# Altium PCB PCB1.PcbDoc (part 1 of 2)
Units mil, origin at the board's own origin, x right, y up, seen from the top; angles counter-clockwise.
Board outline 5190.03 x 3710.02 mil, 4 copper layers (Top Layer, nixie tubes, GND, Bottom Layer), stack 23.756 mil thick; 74 components, 90 nets, 262 pads, 53 vias.
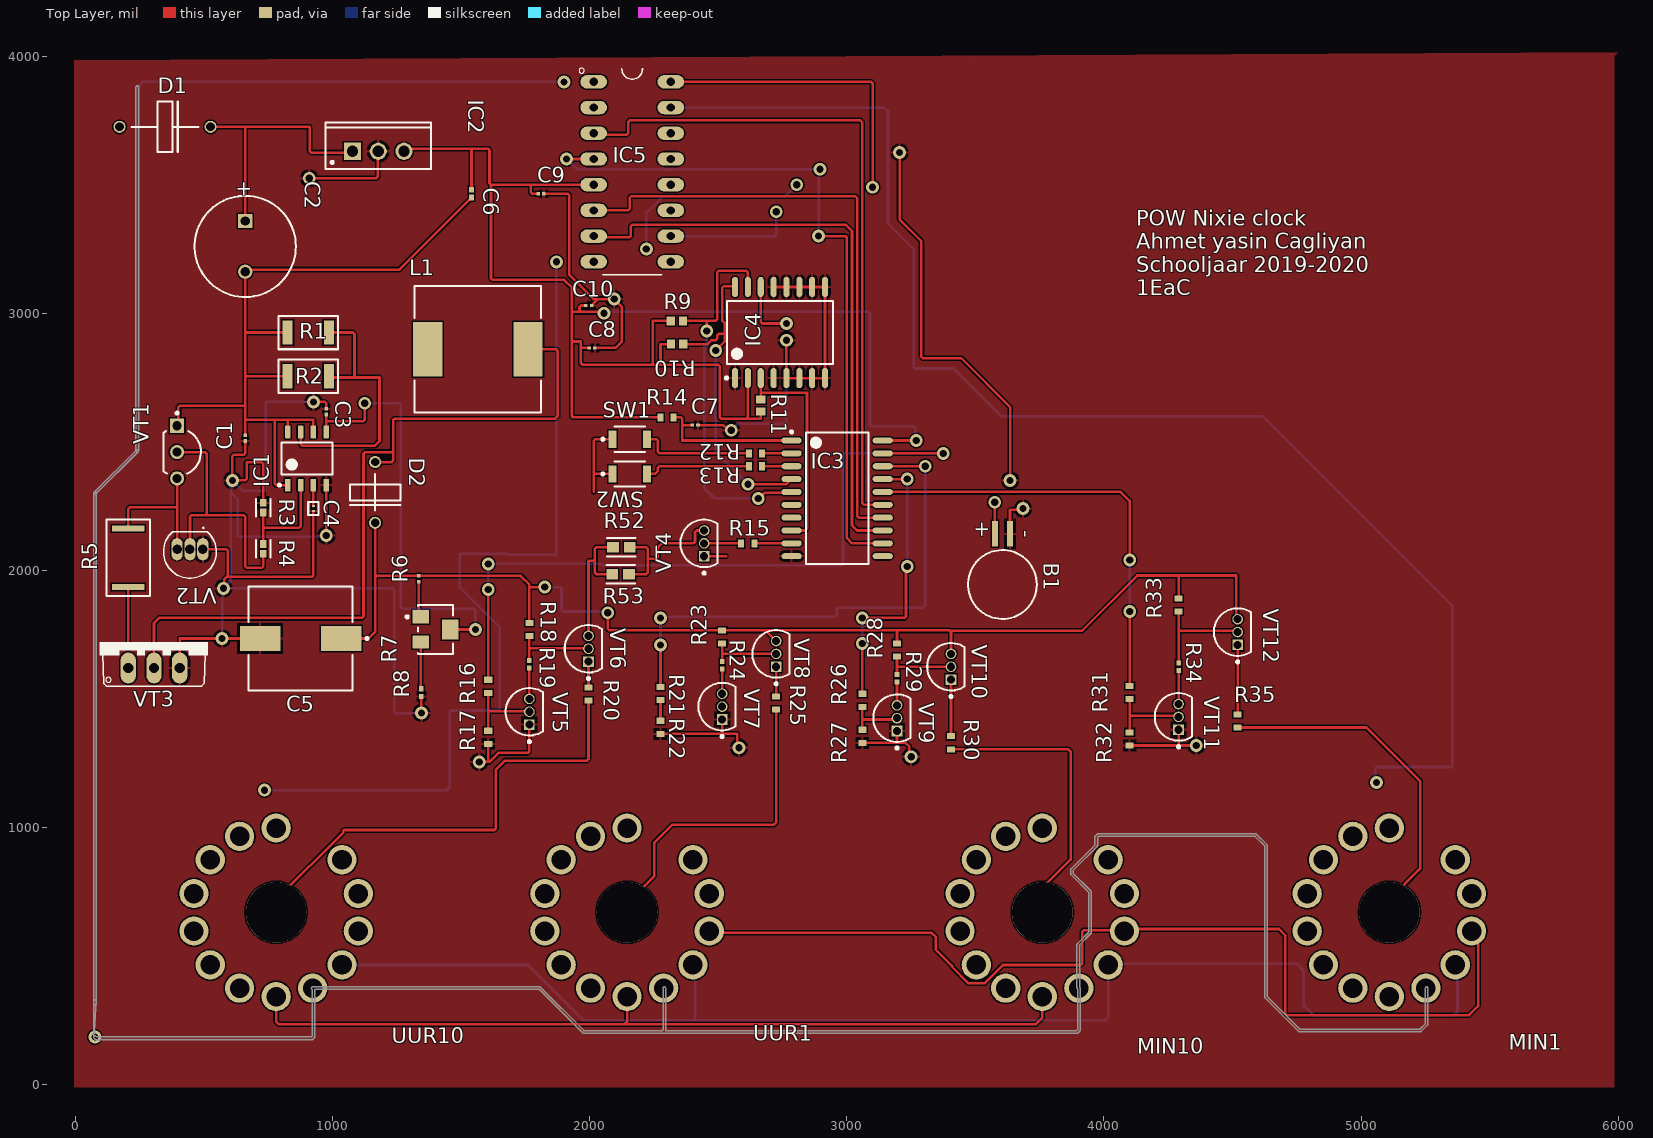
[diagram p0: Top Layer view]
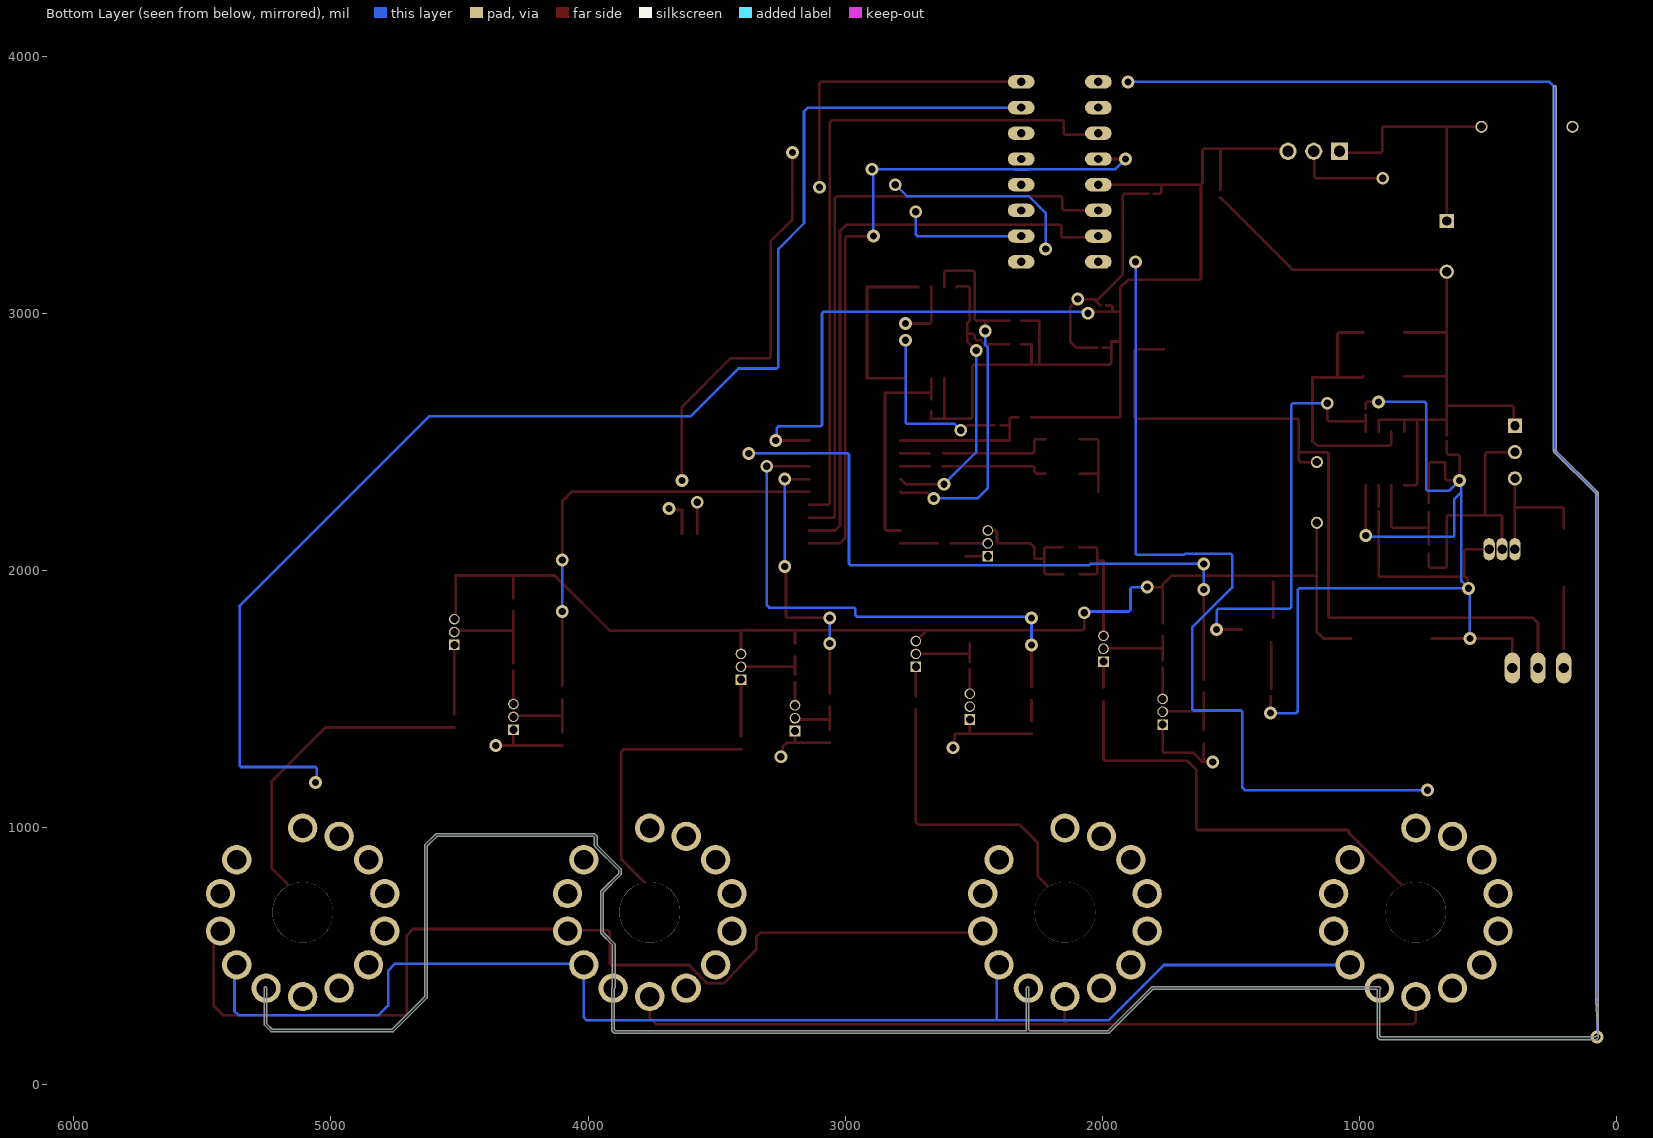
[diagram p1: Bottom Layer view, seen from below]
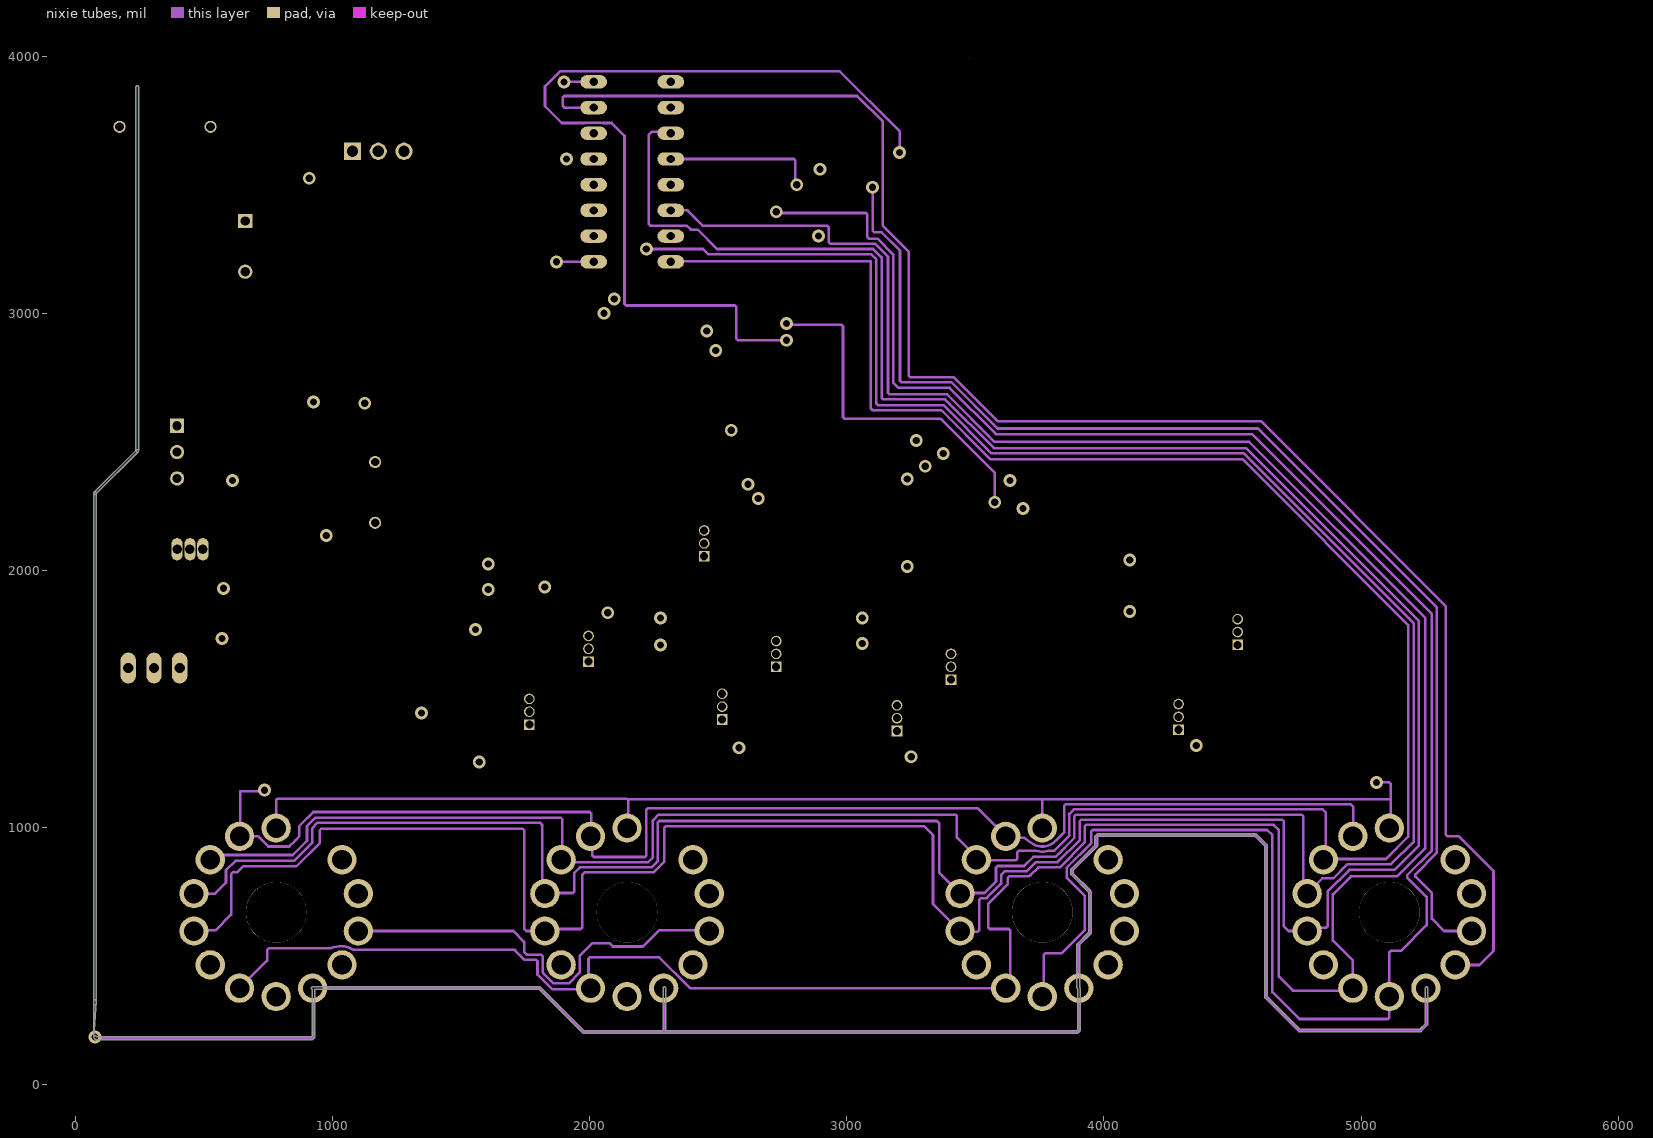
[diagram p2: nixie tubes]

## Layer stack, top to bottom
Top Solder: solder mask 0.4, Solder Resist, Dk 3.5
Top Layer: signal copper 1.4
Dielectric 2: prepreg 2.8, PP-006, Dk 4.1
nixie tubes: signal copper 1.378
Dielectric 1: dielectric 12.6, FR-4, Dk 4.8
GND: signal copper 1.378
Dielectric 3: prepreg 2.8, PP-006, Dk 4.1
Bottom Layer: signal copper 1.4
Bottom Solder: solder mask 0.4, Solder Resist, Dk 3.5

## Board outline
71.47,181.44 cw(c75,185) 69.98,185 cw(c75,185) 78.55,188.55 82.08,185.02 917.92,185.02 919.98,187.08 919.98,369.77 918.58,371.18 918.6,371.16 cw(c922.13,374.72) 922.13,379.74 1805.28,379.74 cw(c1805.28,374.72) 1808.84,378.25 1808.82,378.27 1977.08,210.02 2282.06,210.02 2284.99,212.94 2284.99,374.72 cw(c2290,374.72) 2295.01,374.72 2295.01,210.86 cw(c2290,210.86) 2294.94,210.02 3894.19,210.02 3897.11,212.94 3897.11,372.65 3896.45,373.3 3896.47,373.29 cw(c3900,376.85) 3894.98,376.85 3894.98,545 cw(c3900,545) 3896.47,548.56 3896.45,548.55 3939.98,592.08 3939.98,747.92 3871.45,816.45 3871.47,816.44 cw(c3875,820) 3869.98,820 3869.98,835 cw(c3875,835) 3871.47,838.56 3871.45,838.55 3964.98,932.08 3964.98,964.14 cw(c3970,964.14) 3966.47,967.71 3966.45,967.69 3972.31,973.55 3972.29,973.53 cw(c3975.86,970) 3975.86,975.02 4590,975.02 cw(c4590,970) 4593.56,973.53 4593.55,973.55 4633.55,933.55 4633.53,933.56 cw(c4630,930) 4635.02,930 4635.02,342.08 4762.08,215.02 5227.92,215.02 5249.98,237.08 5249.98,374.72 cw(c5255,374.72) 5260.02,374.72 5260.02,235 cw(c5255,235) 5258.53,231.44 5258.55,231.45 5233.55,206.45 5233.56,206.47 cw(c5230,210) 5230,204.98 4760,204.98 cw(c4760,210) 4756.44,206.47 4756.45,206.45 4626.45,336.45 4626.47,336.44 cw(c4630,340) 4624.98,340 4624.98,927.92 4587.92,964.98 3977.94,964.98 3975.02,962.06 3975.02,930 cw(c3970,930) 3973.53,926.44 3973.55,926.45 3880.02,832.92 3880.02,822.08 3948.55,753.55 3948.53,753.56 cw(c3945,750) 3950.02,750 3950.02,590 cw(c3945,590) 3948.53,586.44 3948.55,586.45 3905.02,542.92 3905.02,378.93 3905.67,378.27 3905.66,378.29 cw(c3902.13,374.72) 3907.14,374.72 3907.14,210.86 cw(c3902.13,210.86) 3905.66,207.29 3905.67,207.31 3899.81,201.45 3899.83,201.47 cw(c3896.27,205) 3896.27,199.98 1975,199.98 cw(c1975,205) 1971.44,201.47 1971.45,201.45 1803.2,369.71 930.02,369.71 930.02,185 cw(c925,185) 928.53,181.44 928.55,181.45 923.55,176.45 923.56,176.47 cw(c920,180) 920,174.98 80,174.98 cw(c80,180) 76.44,176.47 76.45,176.45 71.45,181.45 69.98,185 69.98,325 cw(c75,325) 80.01,325.18 80.02,2297.92 80.02,2300 ccw(c75,2300) 71.47,2303.56 ccw(c75,2300) 69.98,2300 ccw(c75,2300) 78.55,2296.45 243.55,2461.45 243.53,2461.44 cw(c240,2465) 234.98,2465 234.98,3880 cw(c240,3880) 236.47,3883.56 cw(c240,3880) 245.02,3880 245.02,2465 ccw(c240,2465) 236.45,2468.55 71.45,2303.55 69.98,2300 69.98,315 ccw(c75,315) 69.98,314.82 ccw(c75,315) 80.01,315 80.01,325.18 cw(c75,325) 80.02,325
cut-out: 3475,3990

## Design rules (kind name [scope] priority, off if disabled: settings)
Clearance [OnLayer('Top Layer')] p1: gap=5 ignorepadtopadclearanceinfootprint=TRUE except(0: Arc-Hole Track-Hole SMDPad-Hole THPad-Hole Via-Hole Fill-Hole Poly-Hole Region-Hole Text-Hole; 10: Arc-Via Track-Via SMDPad-Via THPad-Via Via-Via)
HoleSize [All] p1: absolutevalues=TRUE maxlimit=300 minlimit=1 maxpercent=80.000 minpercent=20.000
MinimumSolderMaskSliver [All] p1: minsoldermaskwidth=0
PlaneConnect [InNet('GND') And OnLayer('GND')] p1: pad.planeconnectstyle=Relief pad.reliefexpansion=20 pad.reliefentries=4 pad.reliefconductorwidth=10 pad.reliefairgap=10 via.planeconnectstyle=Direct via.reliefexpansion=20 via.reliefentries=4 via.reliefconductorwidth=10 via.reliefairgap=10
PolygonConnect [All] p1: connectstyle=Relief reliefconductorwidth=10 reliefentries=4 polygonreliefangle="90 Angle" airgapwidth=10
RoutingVias [All] p1: holewidth=28 width=50 viastyle="Through Hole" minholewidth=28 minwidth=50 maxholewidth=28 maxwidth=50
SilkToSilkClearance [All] p1: silktosilkclearance=5
SilkToSolderMaskClearance [IsPad] p1: minsilkscreentomaskgap=0 clearancetoexposedcopper=TRUE
SolderMaskExpansion [All] p1: expansion=4 istentingtop=FALSE
Width [All] p1: maxlimit=10 minlimit=10 preferedwidth=10
25 further rules are at their usual default settings.

## Classes and differential pairs
component class PowerSupply: C1 C2 C3 C4 C5 C6 D1 D2 IC1 IC2 L1 R1 R2 R3 R4 R5 R6 R7 R8 VT1 VT2 VT3
component class Clock: B1 BATTERY C7 C8 C9 C10 IC3 IC4 IC5 MIN1 MIN10 R9 R10 R11 R12 R13 R14 R15 R16 R17 R18 R19 R20 R21 R22 R23 R24 R25 R26 R27 R28 R29 R30 R31 R32 R33 R34 R35 R52 R53 SW1 SW2 UUR1 UUR10 VT4 VT5 VT6 VT7 VT8 VT9 VT10 VT11 VT12

## Components (designator, comment, footprint, x,y, rotation, side; value= is the part's Value field where it differs from the comment)
B1 "3V Battery" PNSC-ML-621S-DN_V 3605,1945 r90 top (schematic designator B?)
C1 "0.1µF" CAPC0603X33X15LL03T05 660,2513.98 r270 top
C2 "470µF*25V" CAPPR60-500-1250X1000X1350 660,3260 r270 top
C3 "0.1µF" CAPC0603X33X15LL03T05 975,2617.05 r90 top
C4 "470pF" 470µF 925,2240 r270 top
C5 "10µF*400V" NIC-ULT2G100MNL1GS-2_V 875,1735 r270 top
C6 "100µFx16V" CAPC1005X55X30LL05T10 1540,3465 r270 top
C7 "0.1µF" CAPC0603X33X15LL03T05 2410,2565 r0 top
C8 "0.1µF" CAPC0603X33X15LL03T05 2008.98,2865 r0 top
C9 "0.1µF" CAPC0603X33X15LL03T05 1810,3465 r0 top
C10 "0.1µF" CAPC0603X33X15LL03T05 1996.02,3030 r0 top
D1 "SB260" sb260 170.67,3725 r0 top
D2 "BYV26C" BYV26C-TAP 1165,2421.22 r270 top
IC1 "MC34063" D0008A_L 900,2435 r90 top
IC2 "L7805" TO220 1177.2,3630 r0 top
IC3 "ATTINY" 20S_L 2962.17,2280 r0 top
IC4 "DS3231" W16#H2_L 2740,2925 r90 top
IC5 "SN74141N" *DIP762W46P254L2134H508Q16 2165,3550 r0 top
L1 "220µH" WE-PD-XXL 1565,2860 r0 top
MIN1 "Nixie_tube" *ZM1020_ZM1020(Primary) 5110,670 r180 top
MIN10 "Nixie_tube" *ZM1020_ZM1020(Primary) 3760,670 r180 top
R1 "0.33Ohm" 033Ohm 905,2925 r0 top
R2 "0.33Ohm" 033Ohm 905,2755 r0 top
R3 "390Ohm" FP-CRGCQ0402-IPC_A 730,2243.75 r270 top
R4 "390Ohm" FP-CRGCQ0402-IPC_A 730,2083.75 r270 top
R5 "20Ohm" 20Ohm 205,2163.35 r270 top
R6 "560KOhm" RESC0201(0603)_L 1335,1966.81 r90 top
R7 "5KOhm" BOUR-3214W_V 1400,1770 r0 top
R8 "3K3Ohm" RESC1005X40X25LL05T10 1345,1524.76 r90 top
R9 "5K1Ohm" RESC1608X55X30LL20T20 2338.62,2970 r180 top
R10 "5K1Ohm" RESC1608X55X30LL20T20 2340,2880 r180 top
R11 "5K1Ohm" RESC1608X55X30LL20T20 2665,2641.38 r270 top
R12 "1KOhm" RESC1608X55X25LL10T15 2644.41,2455 r180 top
R13 "1KOhm" RESC1608X55X25LL10T15 2645,2405 r180 top
R14 "1KOhm" RESC1608X55X25LL10T15 2300.59,2595 r180 top
R15 "10KOhm" RESC1608X55X25LL10T15 2614.41,2105 r180 top
R16 "10KOhm" RESC1608X55X25LL10T15 1605,1548.82 r90 top
R17 "10KOhm" RESC1608X55X25LL10T15 1605,1350.59 r90 top
R18 "10KOhm" RESC1608X55X25LL10T15 1765,1769.41 r90 top
R19 "1M" RESC1005X40X25LL05T10 1765,1635.24 r90 top
R20 "10KOhm" RESC1608X55X25LL10T15 1995,1519.41 r90 top
R21 "10KOhm" RESC1608X55X25LL10T15 2275,1520.59 r90 top
R22 "10KOhm" RESC1608X55X25LL10T15 2275,1389.41 r90 top
R23 "10KOhm" RESC1608X55X25LL10T15 2515,1740.59 r90 top
R24 "1M" RESC1005X40X25LL05T10 2515,1630.24 r90 top
R25 "10KOhm" RESC1608X55X25LL10T15 2725,1484.41 r90 top
R26 "10KOhm" RESC1608X55X25LL10T15 3060,1494.41 r90 top
R27 "10KOhm" RESC1608X55X25LL10T15 3060,1354.41 r90 top
R28 "10KOhm" RESC1608X55X25LL10T15 3195,1690.59 r90 top
R29 "1M" RESC1005X40X25LL05T10 3195,1580.24 r90 top
R30 "10KOhm" RESC1608X55X25LL10T15 3405,1329.41 r90 top
R31 "10KOhm" RESC1608X55X25LL10T15 4100,1525 r90 top
R32 "10KOhm" RESC1608X55X25LL10T15 4100,1344.41 r90 top
R33 "10KOhm" RESC1608X55X25LL10T15 4290,1865.59 r90 top
R34 "1M" RESC1005X40X25LL05T10 4290,1625 r90 top
R35 "10KOhm" RESC1608X55X25LL10T15 4520,1414.41 r90 top
R52 "220KOhm" FP-CRGCQ0603-IPC_A 2122.56,2090 r0 top
R53 "220KOhm" FP-CRGCQ0603-IPC_A 2120,1985 r0 top
SW1 "B3U-1000P" OMRON-B3U-1000_V 2155,2510 r0 top
SW2 "B3U-1000P" OMRON-B3U-1000_V 2155,2375 r0 top
UUR1 "Nixie_tube" *ZM1020_ZM1020(Primary) 2145,670 r180 top
UUR10 "Nixie_tube" *ZM1020_ZM1020(Primary) 780,670 r180 top
VT1 "BC546" ONSC-TO-92-3-29-11_AM_BL 395,2460 r270 top
VT2 "BC556" *TO92127P520H534-3 445,2060 r180 top
VT3 "IRF740" *TO220BV_IRF740(Primary) 305,1720 r0 top
VT4 "MPSA42" ONSC-TO-92-3-29-11 2445,2105 r90 top
VT5 "MPSA42" ONSC-TO-92-3-29-11 1765,1450 r90 top
VT6 "MPSA92" ONSC-TO-92-3-29-11 1995,1695 r90 top
VT7 "MPSA42" ONSC-TO-92-3-29-11 2515,1470 r90 top
VT8 "MPSA92" ONSC-TO-92-3-29-11 2725,1675 r90 top
VT9 "MPSA42" ONSC-TO-92-3-29-11 3195,1425 r90 top
VT10 "MPSA92" ONSC-TO-92-3-29-11 3405,1625 r90 top
VT11 "MPSA42" ONSC-TO-92-3-29-11 4290,1430 r90 top
VT12 "MPSA92" ONSC-TO-92-3-29-11 4520,1760 r90 top

## Footprints (in the part's own frame and the unit in brackets; to place one, negate y for a bottom-side part, rotate by r counter-clockwise, add the part's x,y. Pads: shape width x height; smd on the part's side, far side on the other; paste and mask are expansions set on the pad)
20Ohm [mm]
  rect 0.6x3.2 smd: 1(0,0) 2(5.8,0)
  silkscreen extent -0.89,-2.16 6.7,2.16
20S_L [mm] "SOIC, 20-Leads, Body 12.8x7.5mm, Pitch 1.27mm, IPC High Density"
  oval 2x0.6 smd: 1(-4.5,5.715) 2(-4.5,4.445) 3(-4.5,3.175) 4(-4.5,1.905) 5(-4.5,0.635) 6(-4.5,-0.635) 7(-4.5,-1.905) 8(-4.5,-3.175) 9(-4.5,-4.445) 10(-4.5,-5.715) 11(4.5,-5.715) 12(4.5,-4.445) 13(4.5,-3.175) 14(4.5,-1.905) 15(4.5,-0.635) 16(4.5,0.635) 17(4.5,1.905) 18(4.5,3.175) 19(4.5,4.445) 20(4.5,5.715)
  silkscreen extent -4.62,-6.5 3.1,6.69, body extent -3.8,-6.5 3.8,6.5, height 2.65
033Ohm [mm]
  rect 1x2.4 smd: 1(-2.032,0) 2(2.032,0)
  silkscreen extent -2.92,-1.65 2.92,1.65
470µF [mm]
  rect 0.2x0.3 smd: 1(-0.25,0) 2(0.25,0)
  silkscreen extent -0.64,-0.51 0.64,0.51
*DIP762W46P254L2134H508Q16 [mil]
  oval 104x52 hole 32: 1(-150,350) 2(-150,250) 3(-150,150) 4(-150,50) 6(-150,-150) 7(-150,-250) 8(-150,-350) 9(150,-350) 10(150,-250) 11(150,-150) 13(150,50) 14(150,150) 15(150,250) 16(150,350) GND(150,-50) VCC(-150,-50)
  silkscreen extent -207,-400 115,404
*TO220BV_IRF740(Primary) [mil]
  oval 60x120 hole 40: D(0,-100) G(-100,-100) S(100,-100)
  silkscreen extent -210,-170 210,0
*TO92127P520H534-3 [mm]
  oval 1.125x2.2 hole 0.94: 1(-1.27,-0.56)
  oval 1.1x2.2 hole 0.94: 2(0,-0.56) 3(1.27,-0.56)
  silkscreen extent -2.61,-2.71 2.61,2.3
*ZM1020_ZM1020(Primary) [mm]
  round 6 hole 6 unplated: None(0,0)
  round 2.895 hole 1.93: P1(0,-8.325) P2(3.61,-7.5) P3(6.51,-5.19) P4(8.12,-1.85) P5(8.12,1.85) P6(6.51,5.19) P7(3.61,7.5) P8(0,8.325) P9(-3.61,7.5) P10(-6.51,5.19) P11(-8.12,1.85) P12(-8.12,-1.85) P13(-6.51,-5.19)
BOUR-3214W_V [mm] "SMD, 3-Leads, Body 3.5x4.8mm, Pitch 1.25mm"
  rect 1.6x1.3 smd paste+0: 1(-1.45,1.25) 3(-1.45,-1.25)
  rect 1.6x2 smd paste+0: 2(1.45,0)
  silkscreen extent -2.92,-2.4 1.75,2.4, body extent -1.98,-2.41 1.98,2.41, height 5.28
BYV26C-TAP [mm]
  round 1.2 hole 0.82: A(0,0) K(6,0)
  silkscreen extent 1.2,-2.5 4.8,2.5
CAPC0603X33X15LL03T05 [mm] "Chip Capacitor, 2-Leads, Body 0.60x0.30mm, IPC High Density"
  rect 0.36x0.32 smd: 1(-0.28,0) 2(0.28,0)
  body extent -0.32,-0.17 0.32,0.17, height 0.33
CAPC1005X55X30LL05T10 [mm] "Chip Capacitor, 2-Leads, Body 1.00x0.50mm, IPC High Density"
  rect 0.56x0.52 smd: 1(-0.38,0) 2(0.38,0)
  body extent -0.53,-0.28 0.53,0.28, height 0.55
CAPPR60-500-1250X1000X1350 [mm] "THD, 2-Leads, Dia 10mm, Body Length 13.5mm"
  rect 1.4x1.4 hole 0.9: 1(-2.5,0)
  round 1.4 hole 0.9: 2(2.5,0)
  silkscreen extent -5,-5 5,5, body extent -5,-5 5,5, height 13.5
D0008A_L [mm] "SOIC, 8-Leads, Body 5x4mm, Pitch 1.27mm, IPC High Density"
  rrect18% 1.25x0.55 smd: 1(-2.625,1.905) 2(-2.625,0.635) 3(-2.625,-0.635) 4(-2.625,-1.905) 5(2.625,-1.905) 6(2.625,-0.635) 7(2.625,0.635) 8(2.625,1.905)
  silkscreen extent -2.75,-2.5 1.6,2.85, body extent -3,-2.45 3,2.45, height 1.63
FP-CRGCQ0402-IPC_A [mil]
  rect 29.91x26.48 smd paste+0 mask+0: 1(-18.75,0) 2(18.75,0)
  silkscreen extent -34,-29 34,29, body extent -42,-21 42,21, height 10
FP-CRGCQ0603-IPC_A [mil]
  rect 45.6x39.85 smd paste+0 mask+0: 1(-32.56,0) 2(32.56,0)
  silkscreen extent -55,-36 55,36, body extent -75,-40 75,40, height 10
NIC-ULT2G100MNL1GS-2_V [mm] "SMD, 2-Leads, Body 10.3x10.3mm, Height 14.5mm"
  rect 2.5x4 smd: 1(0,4) 2(0,-4)
  silkscreen extent -5.15,-5.15 5.15,6.68, body extent -5.15,-5.65 5.15,5.66, height 14.5
OMRON-B3U-1000_V [mm] "SMD, 2-Leads, Body 3x2.5mm"
  rect 0.8x1.7 smd: 1(-1.7,0) 2(1.7,0)
  silkscreen extent -2.77,-1.25 1.5,1.25, body extent -1.5,-1.25 1.5,1.25, height 1.75
ONSC-TO-92-3-29-11 [mm] "TO, 3-Leads, Body Dia 4.7mm, Pitch 1.27mm"
  rect 1.05x1.05 hole 0.8: 1(-1.27,0)
  round 1.05 hole 0.8: 2(0,0) 3(1.27,0)
  silkscreen extent -3.07,-1.34 2.35,2.35, body extent -2.35,-1.33 2.36,2.36, height 7.87
ONSC-TO-92-3-29-11_AM_BL [mm] "TO, 3-Leads, Body Dia 4.7mm, Pitch 2.6mm"
  rect 1.4x1.4 hole 0.9: 1(-2.6,0)
  round 1.4 hole 0.9: 2(0,0) 3(2.6,0)
  silkscreen extent -3.97,-1.34 2.13,2.35, body extent -2.84,-1.34 2.84,2.35, height 5.33
PNSC-ML-621S-DN_V [mm] "Battery, Lihium, Diameter 6.8mm"
  rect 2.5x0.6 smd: 1(5,0.75) 2(5,-0.75)
  silkscreen extent -3.4,-3.4 3.4,3.4, body extent -3.4,-3.4 6,3.4, height 2.55
RESC0201(0603)_L [mm] "Chip Resistor, Body 0.6x0.3mm, IPC High Density"
  rect 0.35x0.35 smd: 1(-0.3,0) 2(0.3,0)
  body extent -0.31,-0.16 0.31,0.16, height 0.3
RESC1005X40X25LL05T10 [mm] "Chip Resistor, 2-Leads, Body 1.00x0.50mm, IPC High Density"
  rect 0.5x0.45 smd: 1(-0.375,0) 2(0.375,0)
  body extent -0.53,-0.27 0.53,0.28, height 0.4
RESC1608X55X25LL10T15 [mm] "Chip Resistor, 2-Leads, Body 1.60x0.80mm, IPC High Density"
  rect 0.6x0.8 smd: 1(-0.65,0) 2(0.65,0)
  body extent -0.85,-0.45 0.85,0.45, height 0.55
RESC1608X55X30LL20T20 [mm] "Chip Resistor, 2-Leads, Body 1.60x0.80mm, IPC High Density"
  rect 0.8x0.9 smd: 1(-0.6,0) 2(0.6,0)
  body extent -0.9,-0.5 0.9,0.5, height 0.55
sb260 [mm]
  round 1.2 hole 0.86: A(0,0) K(9,0)
  silkscreen extent 1.2,-2.5 7.8,2.5
TO220 [mm] "TO, Thru-Hole, Vertical, Heatsink Mounted; 3 In-Line Leads; Pitch 2.54 mm"
  rect 1.7x1.7 hole 1.1: 1(-2.54,0)
  round 1.7 hole 1.1: 2(0,0) 3(2.54,0)
  silkscreen extent -5.2,-1.75 5.2,2.85, body extent -5.25,-1.8 5.25,2.9, height 19.7
W16#H2_L [mm] "SOIC, 16-Leads, Body 10.3x7.5mm, Pitch 1.27mm, IPC High Density"
  oval 2x0.6 smd: 1(-4.5,4.445) 2(-4.5,3.175) 3(-4.5,1.905) 4(-4.5,0.635) 5(-4.5,-0.635) 6(-4.5,-1.905) 7(-4.5,-3.175) 8(-4.5,-4.445) 9(4.5,-4.445) 10(4.5,-3.175) 11(4.5,-1.905) 12(4.5,-0.635) 13(4.5,0.635) 14(4.5,1.905) 15(4.5,3.175) 16(4.5,4.445)
  silkscreen extent -4.62,-5.25 3.1,5.42, body extent -3.8,-5.25 3.8,5.25, height 2.65
WE-PD-XXL [mm] "SMD Inductor, 2-Leads, Body 12.0 x 12.0 mm"
  rect 2.9x5.4 smd: 1(-4.95,0) 2(4.95,0)
  silkscreen extent -6.25,-6.25 6.25,6.25, body extent -6,-6 6,6, height 10.36

## Part data
B1: library part ML-621S/DN, "Lithium Manganese Dioxide Coin 3V 0.005Ah Secondary", Capacity=5mAh, Manufacturer="Panasonic BSG", Max Operating Temperature=60°C, Min Operating Temperature=-20°C, Output Voltage=3V, Package Quantity=400, Supplier Part Number 1=P044-ND, Category=Uncategorized, Chemistry/Technology=Lithium, ComponentLink1Description=https://datasheet.ciiva.com/2/panasonic-lithium-cr2032-cr2330-2903.pdf?src-supplier=Digi-Key, ComponentLink1URL=https://datasheet.ciiva.com/2/panasonic-lithium-cr2032-cr2330-2903.pdf?src-supplier=Digi-Key, ComponentLink2Description=https://datasheet.ciiva.com/5302/ml-621s-dn-183086-5302976.pdf?src-supplier=Mouser, ComponentLink2URL=https://datasheet.ciiva.com/5302/ml-621s-dn-183086-5302976.pdf?src-supplier=Mouser, ComponentLink3Description=https://datasheet.ciiva.com/3773/panasonic-lithium-ml614s-ml621s1-3773211.pdf?src-supplier=Arrow, ComponentLink3URL=https://datasheet.ciiva.com/3773/panasonic-lithium-ml614s-ml621s1-3773211.pdf?src-supplier=Arrow, Diameter=6mm, Height=2.35mm, Lead Free="Lead Free", Manufacturer Part Number=ML-621S/DN, Mount="Surface Mount", Number of Cells=1, Number of Pins=2, Pricing 1="1=1,91000, 10=1,58300, 50=1,39380, 100=1,31810, 250=1,22716, 500=1,15898, 2400=1,09838, 4800=1,03020 (USD)", RoHS=Yes, Stock 1=88780, Supplier 1=Digi-Key, Termination=Solder, Voltage=3V, Voltage Rating=3V, Weight=0.077603oz
C1 C3 C7 C8 C9 C10: library part GRM033R61A104ME15D, "0.1µF //3.07", Capacitance=100nF, Case Code (Imperial)=0201, Case Code (Metric)=0603, Dielectric=X5R, Manufacturer=Murata, Max Operating Temperature=85°C, Min Operating Temperature=-55°C, Package Quantity=10, Supplier Part Number 1=490-5405-1-ND, Tolerance=20%, Voltage Rating=10V, Case/Package=0201, Category="Ceramic Capacitors", ComponentLink1Description=https://datasheet.ciiva.com/131/partnumbering-e-01-131478.pdf?src-supplier=Digi-Key, ComponentLink1URL=https://datasheet.ciiva.com/131/partnumbering-e-01-131478.pdf?src-supplier=Digi-Key, ComponentLink2Description=https://datasheet.ciiva.com/131/partnumbering-e-01-131479.pdf?src-supplier=Digi-Key, ComponentLink2URL=https://datasheet.ciiva.com/131/partnumbering-e-01-131479.pdf?src-supplier=Digi-Key, Depth=0.3mm, Lead Free="Lead Free", Length=0.024inch, Manufacturer Part Number=GRM033R61A104ME15D, Mount="Surface Mount", Packaging="Tape and Reel", Pricing 1="1=0,10000, 10=0,01500, 100=0,00680, 500=0,00488, 1000=0,00384, 2500=0,00349, 5000=0,00321 (USD)", RoHS=Yes, Stock 1=3664732, Supplier 1=Digi-Key, Thickness=0.013inch, Voltage Rating (DC)=10V, Width=0.012inch
C2: library part ECA-1EHG471, Capacitance=470uF, Case/Package=Radial, Dielectric Material=Aluminium, Leakage Current=3uA, Manufacturer=Panasonic, Max Operating Temperature=105°C, Min Operating Temperature=-55°C, Package Quantity=200, Ripple Current=380mA, Supplier Part Number 1=P5543-ND, Tolerance=20%, Voltage=25V, Category="Aluminum Electrolytic Capacitors", ComponentLink1Description=https://datasheet.ciiva.com/19467/918997-19467378.pdf?src-supplier=Jameco, ComponentLink1URL=https://datasheet.ciiva.com/19467/918997-19467378.pdf?src-supplier=Jameco, ComponentLink2Description=https://datasheet.ciiva.com/11778/0900766b800301b8-11778147.pdf?src-supplier=RSComponents, ComponentLink2URL=https://datasheet.ciiva.com/11778/0900766b800301b8-11778147.pdf?src-supplier=RSComponents, ComponentLink3Description=https://datasheet.ciiva.com/43485/1790596-43485254.pdf?src-supplier=Farnell, ComponentLink3URL=https://datasheet.ciiva.com/43485/1790596-43485254.pdf?src-supplier=Farnell, ComponentLink4Description=https://datasheet.ciiva.com/2983/aba0000ce26-2983833.pdf?src-supplier=Avnet, ComponentLink4URL=https://datasheet.ciiva.com/2983/aba0000ce26-2983833.pdf?src-supplier=Avnet, ComponentLink5Description=https://datasheet.ciiva.com/46396/1903322-46396890.pdf?src-supplier=Element14, ComponentLink5URL=https://datasheet.ciiva.com/46396/1903322-46396890.pdf?src-supplier=Element14, ComponentLink6Description=https://datasheet.ciiva.com/17356/aba0000ce26-17356474.pdf?src-supplier=Avnet+Europe, ComponentLink6URL=https://datasheet.ciiva.com/17356/aba0000ce26-17356474.pdf?src-supplier=Avnet+Europe, ComponentLink7Description=https://datasheet.ciiva.com/48522/radial-nhg-eng-tds-48522141.pdf?src-supplier=Distrelec, ComponentLink7URL=https://datasheet.ciiva.com/48522/radial-nhg-eng-tds-48522141.pdf?src-supplier=Distrelec, Contact Plating=Tin, Diameter=10mm, Dissipation Factor=0.16%, Height=12.5mm, Height - Seated (Max)=0.531inch, Lead Diameter=0.6mm, Lead Free="Lead Free", Lead Pitch=5mm, Lead/Base Style=Straight, Length=12.5mm, Life (Hours)=2000Hour, Manufacturer Part Number=ECA-1EHG471, Mount="Through Hole,PCB", Packaging=Bulk, Polarity=Polar, Pricing 1="1=0,54000, 10=0,38300, 100=0,25190, 500=0,18660, 1000=0,15861, 2500=0,14928, 5000=0,13995 (USD)", Radiation Hardening=No, REACH SVHC="No SVHC", RoHS=Yes, Stock 1=8900, Supplier 1=Digi-Key, Termination=Radial, Voltage Rating=25V, Voltage Rating (DC)=25V
C4: library part GRM0335C1E471JA01D, Dielectric=C0G, Manufacturer=Murata, Supplier Part Number 1=490-16370-1-ND, Tolerance=5%, Voltage Rating (DC)=25V, Capacitance=470pF, Category="Ceramic Capacitors", ComponentLink1Description=http://search.murata.co.jp/Ceramy/image/img/A01X/G101/ENG/GRM0335C1E471JA01-01.pdf?src-supplier=Digi-Key, ComponentLink1URL=http://search.murata.co.jp/Ceramy/image/img/A01X/G101/ENG/GRM0335C1E471JA01-01.pdf?src-supplier=Digi-Key, ComponentLink2Description=https://search.murata.co.jp/Ceramy/image/img/A01X/G101/ENG/GRM0335C1E471JA01-01.pdf?src-supplier=Digi-Key, ComponentLink2URL=https://search.murata.co.jp/Ceramy/image/img/A01X/G101/ENG/GRM0335C1E471JA01-01.pdf?src-supplier=Digi-Key, Length=600um, Manufacturer Part Number=GRM0335C1E471JA01D, Pricing 1="1=0,10000, 10=0,02600, 100=0,01180, 500=0,00844, 1000=0,00662, 2500=0,00602, 5000=0,00554 (USD)", RoHS=No, Stock 1=49317, Supplier 1=Digi-Key, Thickness=300um, Width=300um
C5: library part ULT2G100MNL1GS, Capacitance=10uF, Case/Package=SMD/SMT, Leakage Current=100uA, Manufacturer=Nichicon, Max Operating Temperature=125°C, Min Operating Temperature=-40°C, Package Quantity=1, Ripple Current=50mA, Supplier Part Number 1=493-6726-1-ND, Tolerance=20%, Voltage=400V, Category="Aluminum Electrolytic Capacitors", ComponentLink1Description=https://datasheet.ciiva.com/6311/e-lt-6311659.pdf?src-supplier=Digi-Key, ComponentLink1URL=https://datasheet.ciiva.com/6311/e-lt-6311659.pdf?src-supplier=Digi-Key, ComponentLink2Description=https://datasheet.ciiva.com/6311/e-lt-6311656.pdf?src-supplier=Digi-Key, ComponentLink2URL=https://datasheet.ciiva.com/6311/e-lt-6311656.pdf?src-supplier=Digi-Key, Diameter=8mm, Dissipation Factor=0.25%, Height=13.5mm, Height - Seated (Max)=0.571inch, Lead Pitch=3.1mm, Length=13.5mm, Life (Hours)=2000Hour, Manufacturer Part Number=ULT2G100MNL1GS, Mount="Surface Mount", Packaging="Tape and Reel", Pricing 1="1=1,48000, 10=1,16500, 100=0,87380 (USD)", RoHS=Yes, Stock 1=1088, Supplier 1=Digi-Key, Termination=SMD/SMT, Voltage Rating=400V, Voltage Rating (DC)=400V
C6: library part C0402C101K4GACTU, Capacitance=100pF, Case Code (Imperial)=0402, Case Code (Metric)=1005, Dielectric=C0G, Dielectric Material=Ceramic, Manufacturer=KEMET, Max Operating Temperature=125°C, Min Operating Temperature=-55°C, Package Quantity=1, Supplier Part Number 1=399-7749-1-ND, Tolerance=10%, Voltage Rating=16V, Case/Package=0402, Category="Ceramic Capacitors", ComponentLink1Description=https://datasheet.ciiva.com/5421/kem-c1003-c0g-smd-356956-5421879.pdf?src-supplier=Mouser, ComponentLink1URL=https://datasheet.ciiva.com/5421/kem-c1003-c0g-smd-356956-5421879.pdf?src-supplier=Mouser, Contact Plating=Tin,Matte, Depth=0.5mm, Dissipation Factor=0.1%, Height=0.5mm, Lead Free="Lead Free", Lead Pitch=0.3mm, Length=1mm, Manufacturer Part Number=C0402C101K4GACTU, Mount="Surface Mount", Packaging="Tape and Reel", Pricing 1="1=0,10000, 10=0,02500, 100=0,01120, 500=0,00796, 1000=0,00626, 2500=0,00569, 5000=0,00524 (USD)", REACH SVHC="No SVHC", RoHS=Yes, Stock 1=127674, Supplier 1=Digi-Key, Termination=SMD/SMT, Thickness=0.022inch, Voltage Rating (DC)=16V, Width=0.02inch
D1: library part SB260E-G, Average Rectified Current=2A, Case/Package=DO-15, Manufacturer=Comchip, Max Reverse Leakage Current=500uA, Max Reverse Voltage (DC)=60V, Max Surge Current=50A, Package Quantity=4000, Supplier Part Number 1=641-1414-2-ND, Category="Rectifier Diodes", ComponentLink1Description=https://datasheet.ciiva.com/917/sb220e-g-sb2100e-g-917089.pdf?src-supplier=Digi-Key, ComponentLink1URL=https://datasheet.ciiva.com/917/sb220e-g-sb2100e-g-917089.pdf?src-supplier=Digi-Key, ComponentLink2Description=https://datasheet.ciiva.com/917/sb220e-g-sb2100e-g-917090.pdf?src-supplier=Digi-Key, ComponentLink2URL=https://datasheet.ciiva.com/917/sb220e-g-sb2100e-g-917090.pdf?src-supplier=Digi-Key, Manufacturer Part Number=SB260E-G, Mount="Through Hole", Packaging="Tape and Reel", Pricing 1="4000=0,09150 (USD)", RoHS=Yes, Supplier 1=Digi-Key
D2: library part BYV26C-TAP, Average Rectified Current=1A, Forward Voltage=2.5V, Manufacturer=Vishay, Max Forward Surge Current (Ifsm)=30A, Max Operating Temperature=175°C, Max Repetitive Reverse Voltage (Vrrm)=600V, Min Operating Temperature=-55°C, Package Quantity=1, Peak Reverse Current=5uA, Supplier Part Number 1=BYV26C-TAPCT-ND, Category="Rectifier Diodes", ComponentLink1Description=https://datasheet.ciiva.com/8284/byv26-8284325.pdf?src-supplier=Avnet, ComponentLink1URL=https://datasheet.ciiva.com/8284/byv26-8284325.pdf?src-supplier=Avnet, ComponentLink2Description=https://datasheet.ciiva.com/25936/byv26-25936333.pdf?src-supplier=Avnet+Europe, ComponentLink2URL=https://datasheet.ciiva.com/25936/byv26-25936333.pdf?src-supplier=Avnet+Europe, ComponentLink3Description=https://datasheet.ciiva.com/13949/byv26-13949662.pdf?src-supplier=Digi-Key, ComponentLink3URL=https://datasheet.ciiva.com/13949/byv26-13949662.pdf?src-supplier=Digi-Key, ComponentLink4Description=https://datasheet.ciiva.com/16419/byv26-16419599.pdf?src-supplier=Future+Electronics, ComponentLink4URL=https://datasheet.ciiva.com/16419/byv26-16419599.pdf?src-supplier=Future+Electronics, Contact Plating=Tin,Silver, Current Rating=1A, Diode Type=Avalanche, Element Configuration=Single, Forward Current=1A, Height=3.6mm, Lead Free="Lead Free", Length=4.2mm, Manufacturer Part Number=BYV26C-TAP, Max Reverse Voltage (DC)=600V, Max Surge Current=30A, Mount="Through Hole", Number of Pins=2, Packaging="Ammo Pack", Peak Non-Repetitive Surge Current=30A, Pricing 1="1=0,61000, 10=0,52500, 25=0,49000, 100=0,36400, 250=0,34580, 500=0,28420, 1000=0,23100, 2500=0,21700 (USD)", Radiation Hardening=No, REACH SVHC=Unknown, Recovery Time=30ns, Reverse Recovery Time=30ns, Reverse Voltage=600V, RoHS=Yes, Stock 1=25672, Supplier 1=Digi-Key, Termination=Axial, Width=3.6mm
IC1: library part MC34063ADR, Case/Package=D, Manufacturer="Texas Instruments", Max Input Voltage=40V, Max Operating Temperature=70°C, Max Output Current=750mA, Min Input Voltage=3V, Min Operating Temperature=0°C, Min Output Voltage=1.55V, Output Current=1.5A, Package Quantity=1, Quiescent Current=4mA, Supplier Part Number 1=296-17765-1-ND, Switching Frequency=100kHz, Category="Power Supply Modules", ComponentLink1Description=https://datasheet.ciiva.com/2025/mc33063a-2025161.pdf?src-supplier=Digi-Key, ComponentLink1URL=https://datasheet.ciiva.com/2025/mc33063a-2025161.pdf?src-supplier=Digi-Key, ComponentLink2Description=https://datasheet.ciiva.com/2025/mc33063a-2025162.pdf?src-supplier=Digi-Key, ComponentLink2URL=https://datasheet.ciiva.com/2025/mc33063a-2025162.pdf?src-supplier=Digi-Key, ComponentLink3Description=https://datasheet.ciiva.com/2025/mc33063a-2025163.pdf?src-supplier=Digi-Key, ComponentLink3URL=https://datasheet.ciiva.com/2025/mc33063a-2025163.pdf?src-supplier=Digi-Key, ComponentLink4Description=https://datasheet.ciiva.com/7408/1862376-7408060.pdf?src-supplier=Newark, ComponentLink4URL=https://datasheet.ciiva.com/7408/1862376-7408060.pdf?src-supplier=Newark, Contact Plating=Gold, Lead Free="Lead Free", Manufacturer Part Number=MC34063ADR, Max Output Voltage=40V, Number of Outputs=1, Number of Pins=8, Output Type=Adjustable, Output Voltage=40V, Packaging="Tape and Reel", Pricing 1="1=0,44000, 10=0,37500, 25=0,35000, 100=0,26000, 250=0,22000, 500=0,21000, 1000=0,15500 (USD)", Radiation Hardening=No, REACH SVHC="No SVHC", RoHS=Yes, Stock 1=24041, Supplier 1=Digi-Key, Synchronous Rectifier=No, Termination=SMD/SMT, Topology=Flyback,SEPIC, Weight=0.002561oz
IC2: library part L7805ABD2T-TR, Case/Package=TO-263, Dropout Voltage=2V, Manufacturer=STMicroelectronics, Max Input Voltage=35V, Max Operating Temperature=125°C, Max Output Current=1.5A, Min Input Voltage=7V, Min Operating Temperature=-40°C, Min Output Voltage=5V, Output Voltage Accuracy=2%, Package Quantity=1, Power Supply Rejection Ratio (PSRR)=68dB, Quiescent Current=6mA, Supplier Part Number 1=497-1170-1-ND, Accuracy=2%, Category="Voltage Regulators - Linear", ComponentLink1Description=https://datasheet.ciiva.com/15111/getdatasheetpartid-110622-15111745.pdf?src-supplier=Verical, ComponentLink1URL=https://datasheet.ciiva.com/15111/getdatasheetpartid-110622-15111745.pdf?src-supplier=Verical, ComponentLink2Description=https://datasheet.ciiva.com/22710/1805459-22710936.pdf?src-supplier=Element14, ComponentLink2URL=https://datasheet.ciiva.com/22710/1805459-22710936.pdf?src-supplier=Element14, ComponentLink3Description=https://datasheet.ciiva.com/30477/0900766b81282455-30477417.pdf?src-supplier=RSComponents, ComponentLink3URL=https://datasheet.ciiva.com/30477/0900766b81282455-30477417.pdf?src-supplier=RSComponents, ComponentLink4Description=https://datasheet.ciiva.com/19478/1991635-19478158.pdf?src-supplier=Jameco, ComponentLink4URL=https://datasheet.ciiva.com/19478/1991635-19478158.pdf?src-supplier=Jameco, ComponentLink5Description=https://datasheet.ciiva.com/26904/l7805abd2t-tr-26904404.pdf?src-supplier=IIIC, ComponentLink5URL=https://datasheet.ciiva.com/26904/l7805abd2t-tr-26904404.pdf?src-supplier=IIIC, ComponentLink6Description=https://datasheet.ciiva.com/1511/1805459-1511905.pdf?src-supplier=Element14, ComponentLink6URL=https://datasheet.ciiva.com/1511/1805459-1511905.pdf?src-supplier=Element14, ComponentLink7Description=https://datasheet.ciiva.com/2043/cd00000444-2043017.pdf?src-supplier=Digi-Key, ComponentLink7URL=https://datasheet.ciiva.com/2043/cd00000444-2043017.pdf?src-supplier=Digi-Key, ComponentLink8Description=https://datasheet.ciiva.com/2043/cd00000444-2043018.pdf?src-supplier=Digi-Key, ComponentLink8URL=https://datasheet.ciiva.com/2043/cd00000444-2043018.pdf?src-supplier=Digi-Key, ComponentLink9Description=https://datasheet.ciiva.com/2043/cd00000444-2043019.pdf?src-supplier=Digi-Key, ComponentLink9URL=https://datasheet.ciiva.com/2043/cd00000444-2043019.pdf?src-supplier=Digi-Key, ComponentLink10Description=https://datasheet.ciiva.com/4882/cd00000444-4882284.pdf?src-supplier=Mouser, ComponentLink10URL=https://datasheet.ciiva.com/4882/cd00000444-4882284.pdf?src-supplier=Mouser, ComponentLink11Description=https://datasheet.ciiva.com/16344/cd00000444-16344252.pdf?src-supplier=Future+Electronics, ComponentLink11URL=https://datasheet.ciiva.com/16344/cd00000444-16344252.pdf?src-supplier=Future+Electronics, Contact Plating=Tin,Matte, Height=9.35mm, Lead Free="Lead Free", Length=10.4mm, Manufacturer Part Number=L7805ABD2T-TR, Mount="Surface Mount,Through Hole", Nominal Output Voltage=5V, Number of Outputs=1, Number of Pins=3, Number of Regulators=1, Output Current=1.5A, Output Type=Fixed, Output Voltage=5V, Packaging="Tape and Reel", Polarity=Positive, Pricing 1="1=0,66000, 10=0,57800, 25=0,54240, 100=0,41130, 250=0,35000, 500=0,33250 (USD)", Radiation Hardening=No, REACH SVHC="No SVHC", RoHS=Yes, Stock 1=12154, Supplier 1=Digi-Key, Weight=7.1E-05oz, Width=4.6mm
IC3: library part ATTINY2313V-10SUR, "ATTINY //  5.26", Case/Package=S, Frequency=10MHz, Manufacturer="Microchip / Atmel", Max Operating Temperature=85°C, Max Supply Voltage=5.5V, Min Operating Temperature=-40°C, Min Supply Voltage=1.8V, Package Quantity=1, Category=Microcontrollers, ComponentLink1Description=https://datasheet.ciiva.com/13038/doc2543-74816-13038306.pdf?src-supplier=Mouser, ComponentLink1URL=https://datasheet.ciiva.com/13038/doc2543-74816-13038306.pdf?src-supplier=Mouser, ComponentLink2Description=https://datasheet.ciiva.com/1555/doc2543s-1555616.pdf?src-supplier=Digi-Key, ComponentLink2URL=https://datasheet.ciiva.com/1555/doc2543s-1555616.pdf?src-supplier=Digi-Key, ComponentLink3Description=https://datasheet.ciiva.com/3203/doc2543-3203947.pdf?src-supplier=Avnet, ComponentLink3URL=https://datasheet.ciiva.com/3203/doc2543-3203947.pdf?src-supplier=Avnet, ComponentLink4Description=https://datasheet.ciiva.com/9235/doc2543-9235468.pdf?src-supplier=Avnet, ComponentLink4URL=https://datasheet.ciiva.com/9235/doc2543-9235468.pdf?src-supplier=Avnet, ComponentLink5Description=https://datasheet.ciiva.com/1555/doc2543-1555615.pdf?src-supplier=Digi-Key, ComponentLink5URL=https://datasheet.ciiva.com/1555/doc2543-1555615.pdf?src-supplier=Digi-Key, ComponentLink6Description=https://datasheet.ciiva.com/1555/doc2543-1555617.pdf?src-supplier=Digi-Key, ComponentLink6URL=https://datasheet.ciiva.com/1555/doc2543-1555617.pdf?src-supplier=Digi-Key, ComponentLink7Description=https://datasheet.ciiva.com/46450/1517539-46450326.pdf?src-supplier=Element14, ComponentLink7URL=https://datasheet.ciiva.com/46450/1517539-46450326.pdf?src-supplier=Element14, Contact Plating=Tin,Matte, Core Architecture=AVR, Data Bus Width=8b, Interface=SPI,UART,USART, Lead Free="Lead Free", Manufacturer Part Number=ATTINY2313V-10SUR, Max Frequency=10MHz, Memory Size=2KB, Memory Type=FLASH, Mount="Surface Mount", Number of I/Os=18, Number of Pins=20, Number of Programmable I/O=18, Number of Timers/Counters=2, Oscillator Type=Internal, Packaging="Tape and Reel", Peripherals="Brown-out Detect/Reset,POR,PWM,WDT", Pricing 1="1=1,74000, 25=1,60000, 100=1,45000 (USD)", Radiation Hardening=No, RAM Size=128B, REACH SVHC="No SVHC", RoHS=Yes, Stock 1=2907, Supplier 1=Digi-Key
IC4: library part DS3231S#T&R, "DS3231 //  5.30", Case/Package=SOIC, Manufacturer=Maxim, Max Operating Temperature=70°C, Max Supply Voltage=5.5V, Min Operating Temperature=0°C, Min Supply Voltage=2.3V, Operating Supply Voltage=3.3V, Package Quantity=1000, Supplier Part Number 1=DS3231S#T&RCT-ND, Category="Real Time Clocks", ComponentLink1Description=https://datasheet.ciiva.com/17307/ds3231-17307127.pdf?src-supplier=Avnet+Europe, ComponentLink1URL=https://datasheet.ciiva.com/17307/ds3231-17307127.pdf?src-supplier=Avnet+Europe, ComponentLink2Description=https://datasheet.ciiva.com/14244/ds3231-14244729.pdf?src-supplier=Avnet, ComponentLink2URL=https://datasheet.ciiva.com/14244/ds3231-14244729.pdf?src-supplier=Avnet, ComponentLink3Description=https://datasheet.ciiva.com/14244/ds3231-14244634.pdf?src-supplier=Avnet, ComponentLink3URL=https://datasheet.ciiva.com/14244/ds3231-14244634.pdf?src-supplier=Avnet, ComponentLink4Description=https://datasheet.ciiva.com/1243/ds3231-ds3231s-1243996.pdf?src-supplier=Digi-Key, ComponentLink4URL=https://datasheet.ciiva.com/1243/ds3231-ds3231s-1243996.pdf?src-supplier=Digi-Key, ComponentLink5Description=https://datasheet.ciiva.com/12292/ds3231-102175-12292014.pdf?src-supplier=Mouser, ComponentLink5URL=https://datasheet.ciiva.com/12292/ds3231-102175-12292014.pdf?src-supplier=Mouser, Contact Plating=Tin,Matte, Date Format=YY-MM-DD-dd, Interface=I2C,Serial,2-Wire, Logic Function=Clock, Manufacturer Part Number=DS3231S#T&R, Mount="Surface Mount", Number of Pins=16, Packaging="Tape and Reel", Pricing 1="1=7,66000, 10=6,91900, 25=6,59760, 100=5,72870, 250=5,47120, 500=4,98844 (USD)", Radiation Hardening=No, RoHS=Yes, Stock 1=4111, Supplier 1=Digi-Key, Time Format=HH:MM:SS
IC5: Package=None, Availability=Unavailable, MF="Texas Instruments", MP=SN74141N, Price=None, SnapEDA_Link=https://www.snapeda.com/parts/SN74141N/Texas%20Instruments/view-part/454163/?ref=snap
L1: library part 7447709221, Case Code (Imperial)=1210, Case Code (Metric)=3225, Case/Package=Nonstandard, Current Rating=1.8A, DC Resistance (DCR)=300mR, Inductance=220uH, Inductance Tolerance=20%, Manufacturer="Wurth Electronics", Max Operating Temperature=125°C, Min Operating Temperature=-40°C, Package Quantity=250, Saturation Current=2.2A, Self Resonant Frequency=2.2MHz, Supplier Part Number 1=732-1696-1-ND, Test Frequency=1kHz, Category="Fixed Inductors", ComponentLink1Description=https://datasheet.ciiva.com/1061/7447709221-1061026.pdf?src-supplier=Digi-Key, ComponentLink1URL=https://datasheet.ciiva.com/1061/7447709221-1061026.pdf?src-supplier=Digi-Key, ComponentLink2Description=https://datasheet.ciiva.com/4954/7447709221-75324-4954658.pdf?src-supplier=Mouser, ComponentLink2URL=https://datasheet.ciiva.com/4954/7447709221-75324-4954658.pdf?src-supplier=Mouser, ComponentLink3Description=https://datasheet.ciiva.com/11800/0900766b8079f805-11800438.pdf?src-supplier=RSComponents, ComponentLink3URL=https://datasheet.ciiva.com/11800/0900766b8079f805-11800438.pdf?src-supplier=RSComponents, ComponentLink4Description=https://datasheet.ciiva.com/7754/1736306-7754657.pdf?src-supplier=Element14, ComponentLink4URL=https://datasheet.ciiva.com/7754/1736306-7754657.pdf?src-supplier=Element14, ComponentLink5Description=https://datasheet.ciiva.com/1061/7447709221-1061027.pdf?src-supplier=Digi-Key, ComponentLink5URL=https://datasheet.ciiva.com/1061/7447709221-1061027.pdf?src-supplier=Digi-Key, ComponentLink6Description=https://datasheet.ciiva.com/1061/7447709221-1061028.pdf?src-supplier=Digi-Key, ComponentLink6URL=https://datasheet.ciiva.com/1061/7447709221-1061028.pdf?src-supplier=Digi-Key, ComponentLink7Description=https://datasheet.ciiva.com/22709/1736306-22709765.pdf?src-supplier=Element14, ComponentLink7URL=https://datasheet.ciiva.com/22709/1736306-22709765.pdf?src-supplier=Element14, ComponentLink8Description=https://datasheet.ciiva.com/48691/001087730-da-01-ml-we-pd-smd-speicherdrossel-74477092-de-en-48691142.pdf?src-supplier=Conrad, ComponentLink8URL=https://datasheet.ciiva.com/48691/001087730-da-01-ml-we-pd-smd-speicherdrossel-74477092-de-en-48691142.pdf?src-supplier=Conrad, Composition=Wirewound, Core Material=Ferrite, Depth=12mm, Height=10mm, Height - Seated (Max)=0.394inch, Lead Free="Lead Free", Lead Pitch=7mm, Length=12mm, Manufacturer Part Number=7447709221, Max DC Current=1.8A, Mount="Surface Mount", Number of Pins=2, Packaging="Tape and Reel", Pricing 1="1=2,41000, 10=2,20000, 50=2,07000, 100=1,94000 (USD)", REACH SVHC=Unknown, Resistance=300mR, RMS Current (Irms)=1.8A, RoHS=Yes, Series Resistance=300mR, Shielding=Shielded, Stock 1=427, Supplier 1=Digi-Key, Termination=SMD/SMT, Tolerance=20%, Weight=0.01lb, Width=12mm
R1 R2: library part RL1220S-R33-F, Case Code (Imperial)=0805, Case Code (Metric)=2012, Manufacturer=Susumu, Max Operating Temperature=125°C, Max Power Dissipation=333mW, Min Operating Temperature=-55°C, Package Quantity=1, Power Rating=250mW, Resistance=330mR, Supplier Part Number 1=RL12S.33FCT-ND, Temperature Coefficient=200ppm/°C, Tolerance=1%, Voltage Rating (DC)=100V, Case/Package=0805, Category="Chip SMD Resistors", ComponentLink1Description=https://datasheet.ciiva.com/2487/rl-data-sheet-2487717.pdf?src-supplier=Digi-Key, ComponentLink1URL=https://datasheet.ciiva.com/2487/rl-data-sheet-2487717.pdf?src-supplier=Digi-Key, ComponentLink2Description=https://datasheet.ciiva.com/2487/rl-data-sheet-2487718.pdf?src-supplier=Digi-Key, ComponentLink2URL=https://datasheet.ciiva.com/2487/rl-data-sheet-2487718.pdf?src-supplier=Digi-Key, ComponentLink3Description=https://datasheet.ciiva.com/2487/rl-data-sheet-2487719.pdf?src-supplier=Digi-Key, ComponentLink3URL=https://datasheet.ciiva.com/2487/rl-data-sheet-2487719.pdf?src-supplier=Digi-Key, ComponentLink4Description=https://datasheet.ciiva.com/7984/87305-7984264.pdf?src-supplier=Element14, ComponentLink4URL=https://datasheet.ciiva.com/7984/87305-7984264.pdf?src-supplier=Element14, Composition="Thin Film", Height=0.02inch, Lead Free="Lead Free", Length=0.079inch, Manufacturer Part Number=RL1220S-R33-F, Number of Pins=2, Number of Terminations=2, Packaging="Tape and Reel", Pricing 1="1=0,32000, 10=0,26700, 25=0,19400, 50=0,14080, 100=0,10430, 250=0,08004, 500=0,06308, 1000=0,04367 (USD)", REACH SVHC=Unknown, RoHS=Yes, Stock 1=206920, Supplier 1=Digi-Key, Termination=SMD/SMT, Width=0.049inch
R3 R4: library part CRGCQ0402F390R, Case Code (Imperial)=0402, Case Code (Metric)=1005, Manufacturer="TE Connectivity", Max Operating Temperature=155°C, Max Power Dissipation=63mW, Min Operating Temperature=-55°C, Resistance=390R, Supplier Part Number 1=A129622CT-ND, Temperature Coefficient=100ppm/°C, Tolerance=1%, Case/Package=0402, Catagory=Resistors, ComponentLink1Description=http://www.farnell.com/datasheets/2609223.pdf?src-supplier=Farnell, ComponentLink1URL=http://www.farnell.com/datasheets/2609223.pdf?src-supplier=Farnell, ComponentLink2Description=https://www.te.com/commerce/DocumentDelivery/DDEController?Action=srchrtrv&DocNm=1773204-3&DocType=DS&DocLang=English&src-supplier=Digi-Key, ComponentLink2URL=https://www.te.com/commerce/DocumentDelivery/DDEController?Action=srchrtrv&DocNm=1773204-3&DocType=DS&DocLang=English&src-supplier=Digi-Key, ComponentLink3Description=https://www.te.com/commerce/DocumentDelivery/DDEController?Action=srchrtrv&amp;DocNm=1773204-3&amp;DocType=DS&amp;DocLang=English&src-supplier=Digi-Key, ComponentLink3URL=https://www.te.com/commerce/DocumentDelivery/DDEController?Action=srchrtrv&amp;DocNm=1773204-3&amp;DocType=DS&amp;DocLang=English&src-supplier=Digi-Key, Composition="Thick Film", Features="Moisture Resistant,Automotive AEC-Q200", Manufacturer Part Number=CRGCQ0402F390R, Number of Terminations=2, Packaging="Cut Tape", Pricing 1="1=0,10000, 10=0,02100, 100=0,00860, 1000=0,00387, 2500=0,00336, 5000=0,00277 (USD)", RoHS=No, Stock 1=135459, Supplier 1=Digi-Key
R5: library part ERJ-1TNF20R0U, Case Code (Imperial)=2512, Case Code (Metric)=6432, Manufacturer=Panasonic, Max Operating Temperature=155°C, Max Power Dissipation=1W, Min Operating Temperature=-55°C, Package Quantity=1, Resistance=20R, Supplier Part Number 1=PT20.0AFCT-ND, Temperature Coefficient=100ppm/°C, Tolerance=1%, Voltage Rating=200V, Case/Package=2512, Category="Chip SMD Resistors", ComponentLink1Description=https://datasheet.ciiva.com/6075/1678782-6075750.pdf?src-supplier=Farnell, ComponentLink1URL=https://datasheet.ciiva.com/6075/1678782-6075750.pdf?src-supplier=Farnell, ComponentLink2Description=https://datasheet.ciiva.com/16784/70260748-16784973.pdf?src-supplier=Allied+Electronics, ComponentLink2URL=https://datasheet.ciiva.com/16784/70260748-16784973.pdf?src-supplier=Allied+Electronics, ComponentLink3Description=https://datasheet.ciiva.com/16759/70260748-16759191.pdf?src-supplier=Allied+Electronics, ComponentLink3URL=https://datasheet.ciiva.com/16759/70260748-16759191.pdf?src-supplier=Allied+Electronics, ComponentLink4Description=https://datasheet.ciiva.com/17211/aoa0000ce2-17211049.pdf?src-supplier=Avnet+Europe, ComponentLink4URL=https://datasheet.ciiva.com/17211/aoa0000ce2-17211049.pdf?src-supplier=Avnet+Europe, ComponentLink5Description=https://datasheet.ciiva.com/7795/1678782-7795516.pdf?src-supplier=Element14, ComponentLink5URL=https://datasheet.ciiva.com/7795/1678782-7795516.pdf?src-supplier=Element14, Composition="Thick Film", Contact Plating=Tin, Depth=3.2mm, Features="Automotive AEC-Q200", Height=0.028inch, Lead Free="Lead Free", Length=6.4mm, Manufacturer Part Number=ERJ-1TNF20R0U, Military Standard=Not, Mount="Surface Mount", Number of Terminations=2, Packaging="Tape and Reel", Power Rating=1W, Pricing 1="1=0,56000, 10=0,39700, 100=0,20620, 1000=0,11103 (USD)", Radiation Hardening=No, REACH SVHC=Unknown, RoHS=Yes, Stock 1=8443, Supplier 1=Digi-Key, Termination=SMD/SMT, Voltage Rating (DC)=200V, Width=0.126inch
R6: library part RC0201FR-07560KL, Case Code (Imperial)=0201, Case Code (Metric)=0603, Manufacturer=Yageo, Max Operating Temperature=125°C, Max Power Dissipation=50mW, Min Operating Temperature=-55°C, Resistance=560kR, Supplier Part Number 1=YAG2728CT-ND, Temperature Coefficient=200ppm/°C, Tolerance=1%, Voltage Rating=25V, Case/Package=0201, Category="Chip SMD Resistors", ComponentLink1Description=https://datasheet.ciiva.com/22661/1563626-22661321.pdf?src-supplier=Element14, ComponentLink1URL=https://datasheet.ciiva.com/22661/1563626-22661321.pdf?src-supplier=Element14, Composition="Thick Film", Depth=0.3mm, Features="Moisture Resistant", Height=0.01inch, Length=0.6mm, Manufacturer Part Number=RC0201FR-07560KL, Military Standard=Not, Number of Terminations=2, Packaging="Tape and Reel", Power Rating=50mW, Pricing 1="1=0,10000, 10=0,04000, 100=0,01650, 1000=0,00739, 2500=0,00642, 5000=0,00530 (USD)", REACH SVHC="No SVHC", RoHS=Yes, Stock 1=59650, Supplier 1=Digi-Key, Termination=SMD/SMT, Width=0.3mm
R7: library part 3214W-1-502E, Case/Package=SMD/SMT, Color=Natural, Manufacturer=Bourns, Max Operating Temperature=150°C, Max Power Dissipation=250mW, Min Operating Temperature=-65°C, Package Quantity=1, Resistance=5kR, Temperature Coefficient=100ppm/°C, Tolerance=10%, Voltage Rating=300V, Category="Variable Resistors and Potentiometers", ComponentLink1Description=https://datasheet.ciiva.com/11831/0900766b80025f51-11831009.pdf?src-supplier=RSComponents, ComponentLink1URL=https://datasheet.ciiva.com/11831/0900766b80025f51-11831009.pdf?src-supplier=RSComponents, ComponentLink2Description=https://datasheet.ciiva.com/22616/302354-22616953.pdf?src-supplier=Element14, ComponentLink2URL=https://datasheet.ciiva.com/22616/302354-22616953.pdf?src-supplier=Element14, ComponentLink3Description=https://datasheet.ciiva.com/29042/696221-29042878.pdf?src-supplier=Jameco, ComponentLink3URL=https://datasheet.ciiva.com/29042/696221-29042878.pdf?src-supplier=Jameco, ComponentLink4Description=https://datasheet.ciiva.com/26913/3214w-1-502e-26913820.pdf?src-supplier=IIIC, ComponentLink4URL=https://datasheet.ciiva.com/26913/3214w-1-502e-26913820.pdf?src-supplier=IIIC, ComponentLink5Description=https://datasheet.ciiva.com/2156/3214-2156660.pdf?src-supplier=Digi-Key, ComponentLink5URL=https://datasheet.ciiva.com/2156/3214-2156660.pdf?src-supplier=Digi-Key, ComponentLink6Description=https://datasheet.ciiva.com/2156/3214-2156661.pdf?src-supplier=Digi-Key, ComponentLink6URL=https://datasheet.ciiva.com/2156/3214-2156661.pdf?src-supplier=Digi-Key, ComponentLink7Description=https://datasheet.ciiva.com/2156/3214-2156662.pdf?src-supplier=Digi-Key, ComponentLink7URL=https://datasheet.ciiva.com/2156/3214-2156662.pdf?src-supplier=Digi-Key, ComponentLink8Description=https://datasheet.ciiva.com/16819/3214-16819542.pdf?src-supplier=Avnet+Europe, ComponentLink8URL=https://datasheet.ciiva.com/16819/3214-16819542.pdf?src-supplier=Avnet+Europe, ComponentLink9Description=https://datasheet.ciiva.com/7813/1481448-7813353.pdf?src-supplier=Element14, ComponentLink9URL=https://datasheet.ciiva.com/7813/1481448-7813353.pdf?src-supplier=Element14, ComponentLink10Description=https://datasheet.ciiva.com/3266/3214-3266138.pdf?src-supplier=Avnet, ComponentLink10URL=https://datasheet.ciiva.com/3266/3214-3266138.pdf?src-supplier=Avnet, ComponentLink11Description=https://datasheet.ciiva.com/1130/1481448-1130765.pdf?src-supplier=Element14, ComponentLink11URL=https://datasheet.ciiva.com/1130/1481448-1130765.pdf?src-supplier=Element14, ComponentLink12Description=https://datasheet.ciiva.com/16714/70153435-16714733.pdf?src-supplier=Allied+Electronics, ComponentLink12URL=https://datasheet.ciiva.com/16714/70153435-16714733.pdf?src-supplier=Allied+Electronics, ComponentLink13Description=https://datasheet.ciiva.com/5002/3214-62059-5002302.pdf?src-supplier=Mouser, ComponentLink13URL=https://datasheet.ciiva.com/5002/3214-62059-5002302.pdf?src-supplier=Mouser, ComponentLink14Description=https://datasheet.ciiva.com/48714/001054844-da-01-en-smd-trimmer-3214w-1-502e-5k-ohm-0-25w-48714987.pdf?src-supplier=Conrad, ComponentLink14URL=https://datasheet.ciiva.com/48714/001054844-da-01-en-smd-trimmer-3214w-1-502e-5k-ohm-0-25w-48714987.pdf?src-supplier=Conrad, Composition=Cermet,Potentiometer, Contact Plating=Tin, Depth=3.9mm, Height=0.209inch, Lead Free="Lead Free", Length=4.8mm, Manufacturer Part Number=3214W-1-502E, Military Standard=Not, Mount="Surface Mount", Number of Turns=5, Packaging="Tape and Reel", Power Rating=250mW, Pricing 1="1=3,24000, 10=2,83400, 25=2,53000, 50=2,37820, 100=2,32760 (USD)", Radiation Hardening=No, REACH SVHC="No SVHC", RoHS=Yes, Stock 1=4331, Supplier 1=Digi-Key, Taper=Linear, Termination=J-Hook, Thickness=5.59mm, Voltage Rating (DC)=300V, Weight=0.283g, Width=0.139inch